# Altium PCB hexapod_board_pcb.PcbDoc
Units mm, origin at the board's own origin, x right, y up, seen from the top; angles counter-clockwise.
Board outline 71.12 x 64.77 mm, 2 copper layers (Top Layer, Bottom Layer); 14 components, 8 nets, 100 pads, 13 vias.
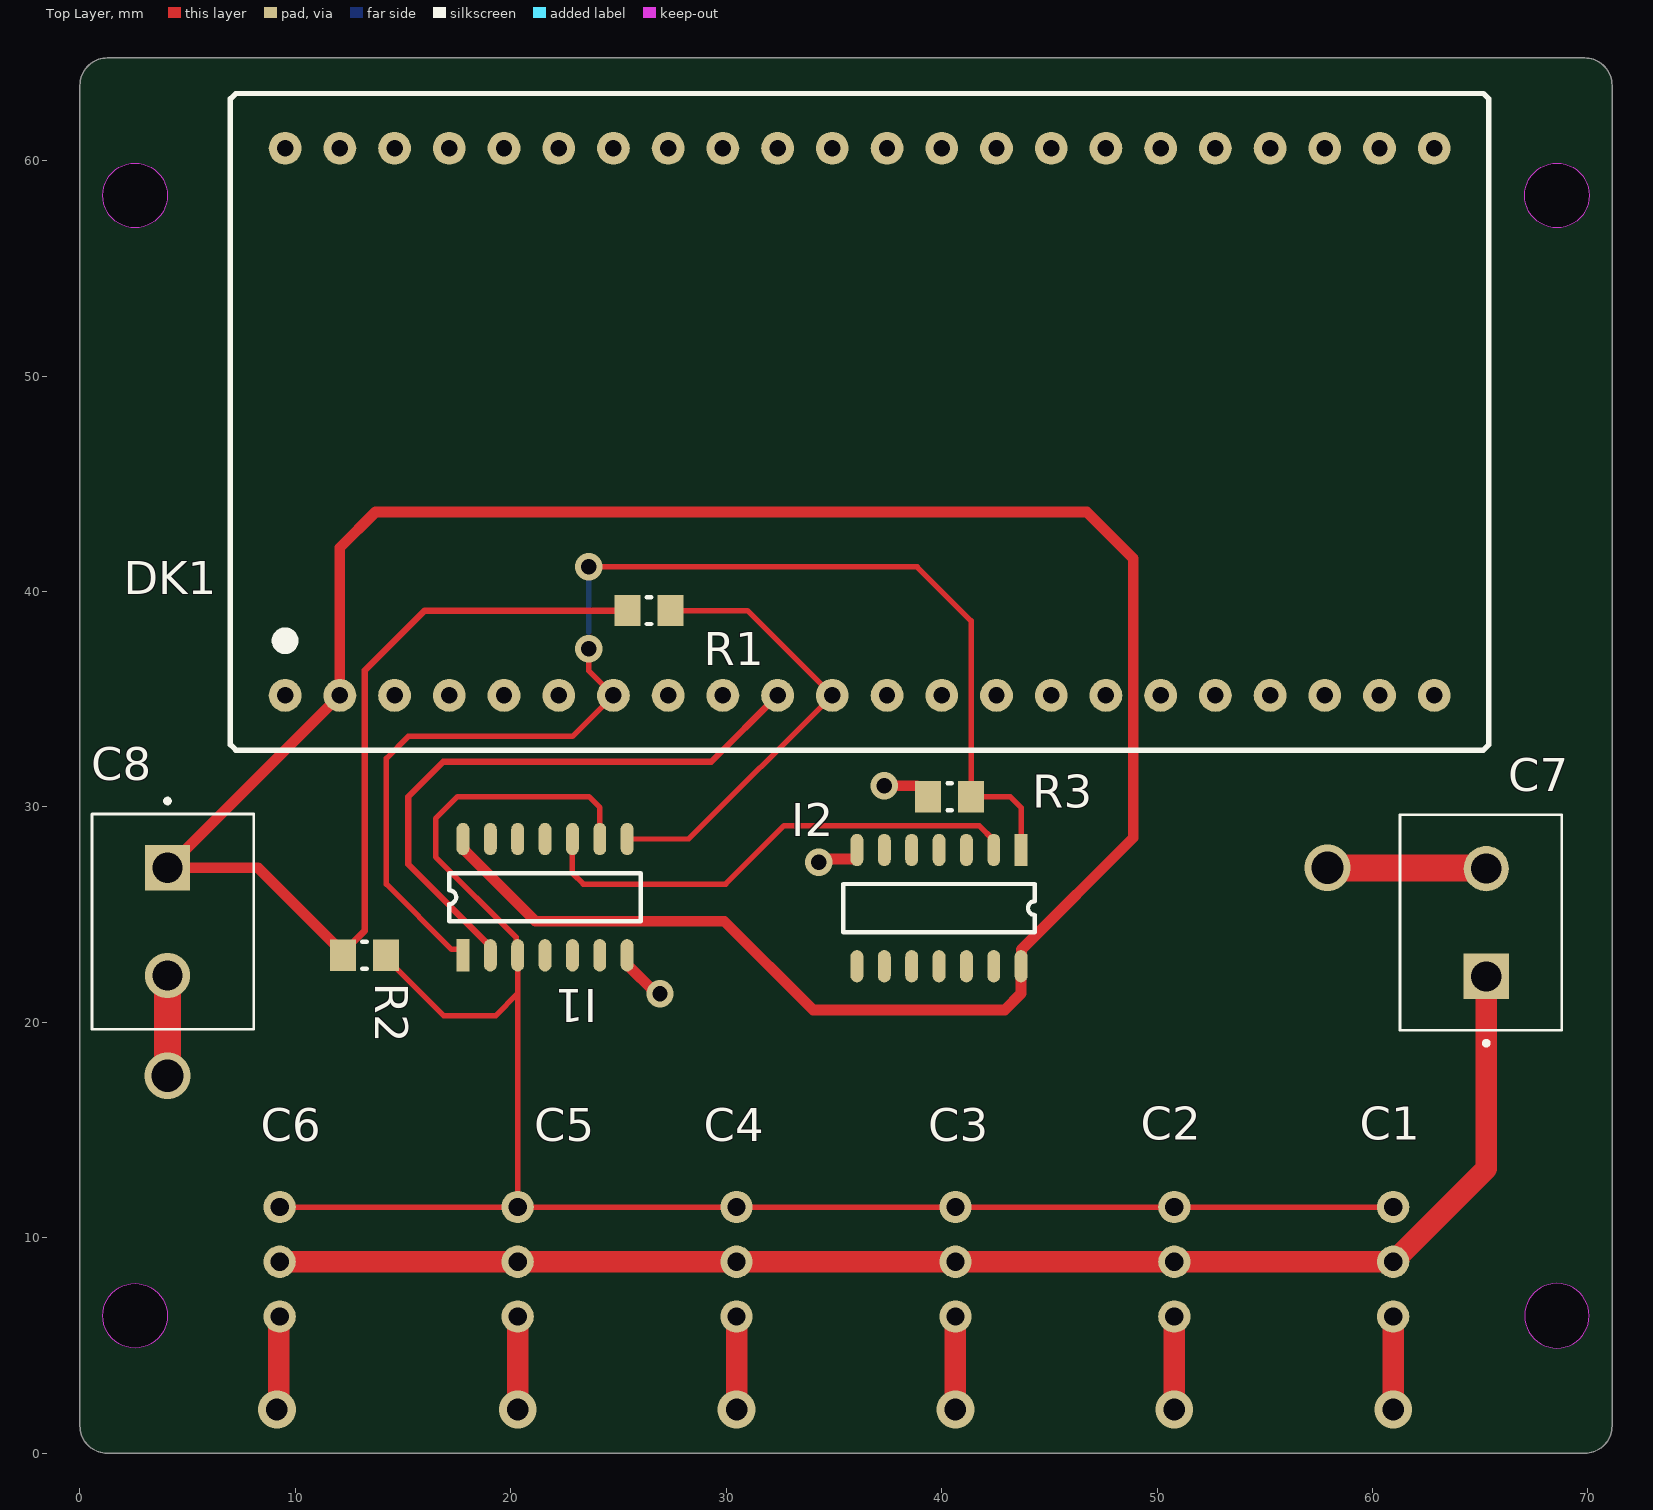
[diagram p0: Top Layer view]
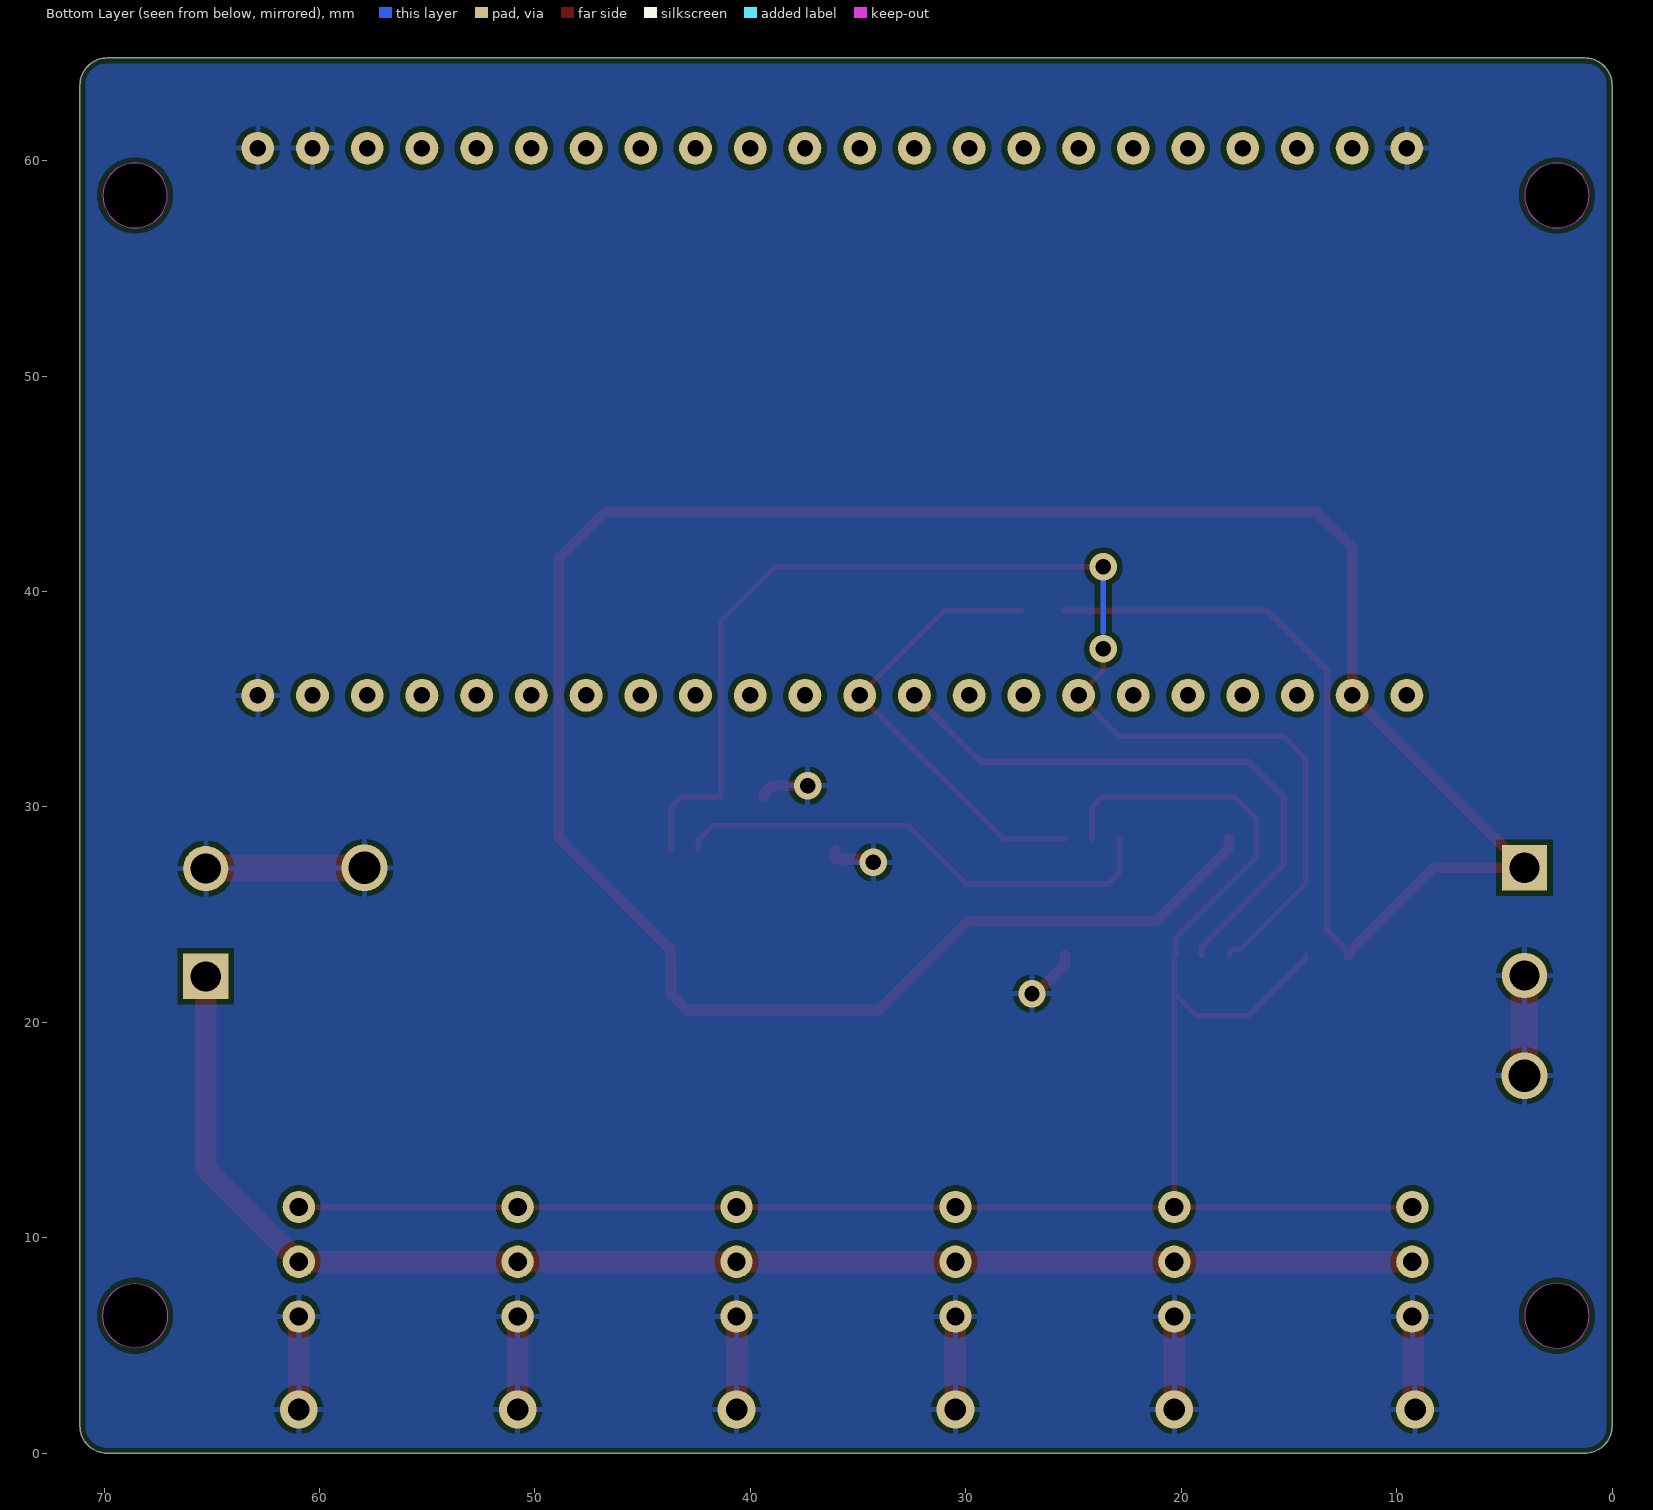
[diagram p1: Bottom Layer view, seen from below]
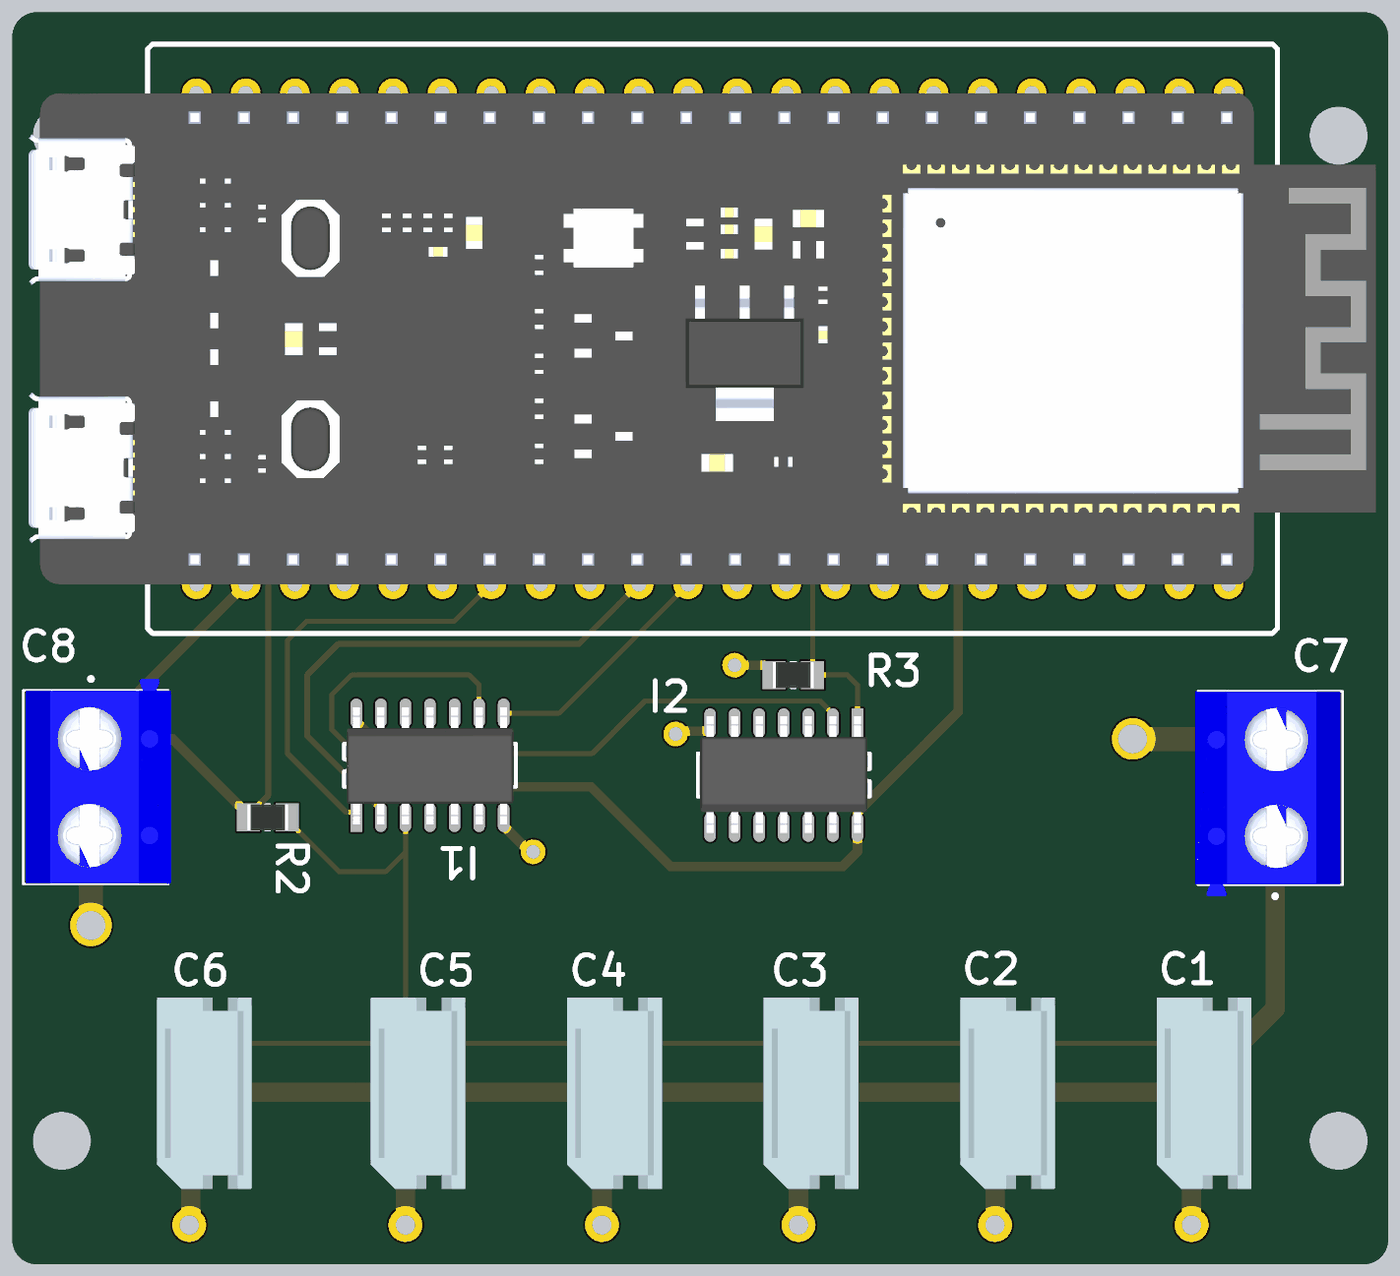
[diagram p2: 3D render of the assembled board from above, using the file's embedded part models]

## Layer stack, top to bottom
Top Solder: solder mask 0.0102, Solder Resist, Dk 3.5
Top Layer: signal copper 0.0356
Dielectric 1: dielectric 0.32, FR-4, Dk 4.8
Bottom Layer: signal copper 0.0356
Bottom Solder: solder mask 0.0102, Solder Resist, Dk 3.5

## Board outline
0,1.27 0,63.5 cw(c1.27,63.5) 1.27,64.77 69.85,64.77 cw(c69.85,63.5) 71.12,63.5 71.12,1.27 cw(c69.85,1.27) 69.85,0 1.27,0 cw(c1.27,1.27)
cut-out: 2.56,4.885 cw(c2.56,6.385) 1.06,6.385 cw(c2.56,6.385) 2.56,7.885 cw(c2.56,6.385) 4.06,6.385 cw(c2.56,6.385)
cut-out: 67.06,6.385 ccw(c68.56,6.385) 68.56,4.885 ccw(c68.56,6.385) 70.06,6.385 ccw(c68.56,6.385) 68.56,7.885 ccw(c68.56,6.385)
cut-out: 68.56,56.885 cw(c68.56,58.385) 67.06,58.385 cw(c68.56,58.385) 68.56,59.885 cw(c68.56,58.385) 70.06,58.385 cw(c68.56,58.385)
cut-out: 2.56,56.885 cw(c2.56,58.385) 1.06,58.385 cw(c2.56,58.385) 2.56,59.885 cw(c2.56,58.385) 4.06,58.385 cw(c2.56,58.385)

## Design rules (kind name [scope] priority, off if disabled: settings)
AssemblyTestPointUsage [All] p1: isadvanced=TRUE
AssemblyTestpoint [All] p1: isadvanced=TRUE testpointundercomponent=TRUE minsize=1.016 maxsize=2.54 preferedsize=1.524 minholesize=0 maxholesize=1.016 preferedholesize=0.813 testpointgrid=0.025 usegrid=TRUE gridtolerance=0 allowsidetop=TRUE allowsidebottom=TRUE
BoardOutlineClearance BoardOutlineClearance_2 [All] p1: isadvanced=TRUE gap=0.254 ignorepadtopadclearanceinfootprint=FALSE except(0: Arc-SplitContinuation Track-SplitContinuation SMDPad-SplitContinuation THPad-SplitContinuation Via-SplitContinuation Fill-SplitContinuation Poly-SplitContinuation Region-SplitContinuation Text-SplitContinuation)
BoardOutlineClearance BoardOutlineClearance_1 [All] p2: isadvanced=TRUE gap=0.254 ignorepadtopadclearanceinfootprint=FALSE except(0: Arc-SplitContinuation Track-SplitContinuation SMDPad-SplitContinuation THPad-SplitContinuation Via-SplitContinuation Fill-SplitContinuation Poly-SplitContinuation Region-SplitContinuation Text-SplitContinuation)
Clearance Clearance_1 [All] p1: isadvanced=TRUE gap=0.254 ignorepadtopadclearanceinfootprint=TRUE except(0: Hole-Hole; 0.1: Arc-Arc Arc-Track Arc-SMDPad Arc-Text Track-Track Track-SMDPad Track-Text SMDPad-SMDPad SMDPad-Fill SMDPad-Text Text-Text)
Clearance Clearance_1 [OnMid vs OnMid] p2: gap=0.254 ignorepadtopadclearanceinfootprint=FALSE sourcerule=42 cellrowname=All cellrowtype=0 cellcolname=All cellcoltype=0 innerlayers=TRUE
Clearance Clearance_2 [(ExistsOnLayer('Top Layer') Or ExistsOnLayer('Bottom Layer')) vs (ExistsOnLayer('Top Layer') Or ExistsOnLayer('Bottom Layer'))] p3: gap=0.254 ignorepadtopadclearanceinfootprint=FALSE sourcerule=42 cellrowname=All cellrowtype=0 cellcolname=All cellcoltype=0 outerlayers=TRUE
Clearance [All] p4: gap=0.254 ignorepadtopadclearanceinfootprint=FALSE ismatrix=TRUE
ComponentClearance [All] p1: isadvanced=TRUE gap=0.254 collisioncheckmode=3 verticalgap=0.254 showdistances=FALSE
FabricationTestPointUsage [All] p1: isadvanced=TRUE valid=0 allowmultiple=FALSE
FabricationTestpoint [All] p1: isadvanced=TRUE side=3 testpointundercomponent=TRUE minsize=1.016 maxsize=2.54 preferedsize=1.524 minholesize=0 maxholesize=1.016 preferedholesize=0.813 testpointgrid=0.025 allowsidetop=TRUE allowsidebottom=TRUE usegrid=TRUE gridtolerance=0
FanoutControl Fanout_BGA [IsBGA] p1: isadvanced=TRUE bgadir=Out bgaviamode=Centered fanoutstyle=Auto fanoutdirection=Alternating viagrid=0.025 // Fanout_BGA (Default Rule)
FanoutControl Fanout_LCC [IsLCC] p2: isadvanced=TRUE bgadir=Out bgaviamode=Centered fanoutstyle=Auto fanoutdirection=Alternating viagrid=0.025 // Fanout_LCC (Default Rule)
FanoutControl Fanout_SOIC [IsSOIC] p3: isadvanced=TRUE bgadir=Out bgaviamode=Centered fanoutstyle=Auto fanoutdirection=Alternating viagrid=0.025 // Fanout_SOIC (Default Rule)
FanoutControl Fanout_Small [(CompPinCount < 5)] p4: isadvanced=TRUE bgadir=Out bgaviamode=Centered fanoutstyle=Auto fanoutdirection=OutThenIn viagrid=0.025 // Fanout_Small (Default Rule)
FanoutControl Fanout_Default [All] p5: isadvanced=TRUE bgadir=Out bgaviamode=Centered fanoutstyle=Auto fanoutdirection=Alternating viagrid=0.025 // Fanout_Default (Default Rule)
Height [All] p1: isadvanced=TRUE minheight=0 maxheight=25.4 prefheight=12.7
HoleSize [All] p1: isadvanced=TRUE absolutevalues=TRUE maxlimit=2.54 minlimit=0.203 maxpercent=80.000 minpercent=20.000
HoleToHoleClearance [All] p1: isadvanced=TRUE gap=0.254 allowstackedmicrovias=TRUE
LayerPairs [All] p1: isadvanced=TRUE enforce=TRUE
MinimumSolderMaskSliver [All] p1: isadvanced=TRUE minsoldermaskwidth=0.254
NetAntennae [All] p1: isadvanced=TRUE netantennaetolerance=0
PasteMaskExpansion [All] p1: isadvanced=TRUE expansion=0
PlaneClearance [All] p1: isadvanced=TRUE clearance=0.508
PlaneConnect [All] p1: isadvanced=TRUE planeconnectstyle=Relief reliefexpansion=0.508 reliefentries=4 reliefconductorwidth=0.254 reliefairgap=0.254
PolygonConnect [All] p1: connectstyle=Relief reliefconductorwidth=0.254 reliefentries=4 polygonreliefangle="90 Angle" airgapwidth=0.254
RoutingCorners [All] p1: isadvanced=TRUE cornerstyle=45-Degree minsetback=2.54 maxsetback=2.54
RoutingPriority [All] p1: isadvanced=TRUE routingpriority=0
RoutingVias RoutingViaStyle_1 [All] p1: isadvanced=TRUE holewidth=0.4 width=0.6 viastyle="Through Hole" minholewidth=0.2 minwidth=0.3 maxholewidth=2.5 maxwidth=3
RoutingVias [All] p2: holewidth=0.711 width=1.27 viastyle="Through Hole" minholewidth=0.711 minwidth=1.27 maxholewidth=0.711 maxwidth=1.27
ShortCircuit [All] p1: isadvanced=TRUE allowed=FALSE
SilkToSilkClearance [All] p1: isadvanced=TRUE silktosilkclearance=0.254
SilkToSolderMaskClearance [IsPad] p1: isadvanced=TRUE minsilkscreentomaskgap=0.175 clearancetoexposedcopper=TRUE
SolderMaskExpansion [All] p1: isadvanced=TRUE expansion=0.102 istentingtop=FALSE
UnRoutedNet UnRoutedNet_1 [InNet('GND')] p1: isadvanced=TRUE checkbadconnections=TRUE
UnRoutedNet [All] p2: isadvanced=TRUE
UnpouredPolygon [All] p1: isadvanced=TRUE
Width MaxMinWidth_1 [All] p1: isadvanced=TRUE maxlimit=1.27 minlimit=0.102 preferedwidth=0.254 minimp=50.000000 maximp=50.000000 favimp=50.000000
Width [All] p2: maxlimit=3 minlimit=0.1 preferedwidth=0.3
4 further rules are at their usual default settings.

## Classes and differential pairs
component class hexapod_board_schematics: C1 C2 C3 C5 C6 C7 C8 DK1 I1 I2 R1 R3

## Components (designator, comment, footprint, x,y, rotation, side; value= is the part's Value field where it differs from the comment)
C1 "MOLEX 22-03-5035" PCBComponent_1 60.96,6.35 r90 top
C2 "MOLEX 22-03-5035" PCBComponent_1 50.8,6.35 r90 top
C3 "MOLEX 22-03-5035" PCBComponent_1 30.48,6.35 r90 top
C4 "MOLEX 22-03-5035" PCBComponent_1 20.32,6.35 r90 top
C5 "MOLEX 22-03-5035" PCBComponent_1 9.271,6.35 r90 top
C6 "MOLEX 22-03-5035" PCBComponent_1 40.64,6.35 r90 top
C7 "ARK connector 5mm" "ARK connector footprint" 65.278,24.638 r90 top
C8 "ARK connector 5mm" "ARK connector footprint" 4.064,24.678 r270 top
DK1 "ESP32-S3" "ESP32-S3-DevKit footprint" 34.925,47.879 r90 top
I1 "74LVC125A" SOP14 17.78,23.114 r90 top
I2 "74LVC14AD" SOP14 43.688,28.006 r270 top
R1 "10k" RESC2013X60X35ML10T20 26.416,39.116 r180 top
R2 "10k" RESC2013X60X35ML10T20 13.208,23.114 r180 top
R3 "10k" RESC2013X60X35ML10T20 40.37,30.48 r0 top

## Footprints (in the part's own frame and the unit in brackets; to place one, negate y for a bottom-side part, rotate by r counter-clockwise, add the part's x,y. Pads: shape width x height; smd on the part's side, far side on the other; paste and mask are expansions set on the pad)
"ARK connector footprint" [mm]
  rect 2.1x2.1 hole 1.4: 1(-2.5,0)
  round 2.1 hole 1.4: 2(2.5,0)
  silkscreen extent -5.7,-3.5 5,4, body extent -5.6,-3.37 5,4.13, height 10
"ESP32-S3-DevKit footprint" [mil]
  round 60 hole 30: 1(-500,1000) 2(-500,900) 3(-500,800) 4(-500,700) 5(-500,600) 6(-500,500) 7(-500,400) 8(-500,300) 9(-500,200) 10(-500,100) 11(-500,0) 12(-500,-100) 13(-500,-200) 14(-500,-300) 15(-500,-400) 16(-500,-500) 17(-500,-600) 18(-500,-700) 19(-500,-800) 20(-500,-900) 21(-500,-1000) 22(-500,-1100) 23(500,-1100) 24(500,-1000) 25(500,-900) 26(500,-800) 27(500,-700) 28(500,-600) 29(500,-500) 30(500,-400) 31(500,-300) 32(500,-200) 33(500,-100) 34(500,0) 35(500,100) 36(500,200) 37(500,300) 38(500,400) 39(500,500) 40(500,600) 41(500,700) 42(500,800) 43(500,900) 44(500,1000)
  silkscreen extent -600,-1200 600,1100, body extent -500,-1400 500,1342, height 361
PCBComponent_1 [mm]
  round 1.5 hole 0.85: 1(0,0) 2(2.54,0) 3(5.08,0)
  body extent -2.45,-3.1 7.45,1.8, height 5.8
RESC2013X60X35ML10T20 [mm] "Chip Resistor, 2-Leads, Body 2.1x1.35mm, IPC Low Density"
  rect 1.2x1.45 smd: 1(-1,0) 2(1,0)
  silkscreen extent -0.1,-0.62 0.1,0.62, body extent -1.05,-0.68 1.05,0.67, height 0.6
SOP14 [mm]
  rect 1.5x0.6 smd: 1(0,0)
  oval 1.5x0.6 smd: 2(0,-1.27) 3(0,-2.54) 4(0,-3.81) 5(0,-5.08) 6(0,-6.35) 7(0,-7.62) 8(5.4,0) 9(5.4,-1.27) 10(5.4,-2.54) 11(5.4,-3.81) 12(5.4,-5.08) 13(5.4,-6.35) 14(5.4,-7.62)
  silkscreen extent 1.59,-8.25 3.81,0.64, body extent -0.36,-8.13 5.69,0.51, height 1.64

## Part data
DK1: library part "ESP32-S3-N16R2 DevKit"
R1 R2 R3: library part CMP-2100-03673-1, "Chip Resistor, 0 Ohm, Jumper, +/- 5%, 0.125 W, -55 to 155 degC, 0805 (2012 Metric), RoHS, Tape and Reel", Case Code (Imperial)=0805, Case Code (Metric)=2012, Manufacturer=Yageo, Max Operating Temperature=155degC, Min Operating Temperature=-55degC, Package Description="2-Pin Surface Mounted Device, Body 2 x 1.25 mm", Power Rating=125mW, Resistance=0mOhm, Temperature Coefficient=200ppm/degreesC, Tolerance=5%, Voltage Rating=150V, Case/Package=0805, Composition=ThickFilm, Contact Plating=Tin, Datasheet URL=http://www.yageo.com/NewPortal/yageodocoutput?fileName=/pdf/R-Chip/PYu-RC_Group_51_RoHS_L_5.pdf, Datasheet Version="Rev. 5, 10/2016", Depth=1.25mm, Height=0.5mm, Lead Free=LeadFree, Length=2mm, Manufacturer URL=http://www.yageo.com/, Military Standard=Not, Number of Pins=2, Package Reference=0805, Packaging=TapeandReel, Radiation Hardening=No, REACH SVHC=Unknown, RoHSCompliant=true, Termination=SMD/SMT, Voltage Rating (DC)=150V, Width=1.25mm

## Via types
v1: diameter 1.75, hole 1, Top Layer to Bottom Layer, 6 vias
v2: diameter 1.27, hole 0.711, Top Layer to Bottom Layer, 5 vias
v3: diameter 2.15, hole 1.5, Top Layer to Bottom Layer, 2 vias

## Nets (pads, with @x,y where several pads share a name; then routed paths per layer and width w, separated by ;. In a path a pad name is that pad's centre, name@x,y a point inside that pad or via, vN(x,y) a via of type N, cw(c..) or ccw(c..) an arc to the next point about the centre after c; other vN are vias at no path point)
3V3: C8.1 DK1.2 I1.8 I2.8 R1.2 R2.2 | length 145.5
  Top Layer w0.3: R2.2@12.208,23.239 13.231,24.262 13.231,36.345 16.002,39.116 R1.2
  Top Layer w0.5: R2.2 12.208,23.239 8.269,27.178 C8.1 DK1.2 12.065,42.037 13.716,43.688 46.736,43.688 48.891,41.533 48.891,28.571 43.707,23.387 43.707,22.625 I2.8 43.688,21.336 42.926,20.574 34.036,20.574 29.912,24.698 21.146,24.698 17.78,28.064 I1.8
12V: C1.2 C2.2 C3.2 C4.2 C5.2 C6.2 C7.1 | length 66.7
  Top Layer w1: C5.2 C4.2 C3.2 C6.2 C2.2 C1.2 65.278,13.208 C7.1
GND: C1.1 C2.1 C3.1 C4.1 C5.1 C6.1 C7.2 C8.2 DK1.22 DK1.23 DK1.24 DK1.44 I1.7 I2.7 R3.1 | length 45.1
  Top Layer w0.5: I1.7 25.4,22.691 26.755,21.336 v2(26.924,21.336) ; v2(34.29,27.432) 34.437,27.579 36.022,27.579 36.068,27.626 I2.7 ; v2(37.338,30.988) 38.862,30.988 38.895,30.955 39.02,30.955 39.37,30.605 R3.1
  Top Layer w1: v1@9.223,2.111 C5.1@9.223,6.302 ; v1(20.32,2.032) C4.1 ; v1(30.48,2.032) C3.1 ; v1(40.64,2.032) C6.1 ; v1(50.8,2.032) C2.1 ; v1(60.96,2.032) C1.1
  Top Layer w1.25: v3(4.064,17.526) C8.2 ; v1(9.144,2.032) v1@9.223,2.111 ; C5.1@9.223,6.302 C5.1 ; v3(57.912,27.178) 57.932,27.158 65.258,27.158 C7.2
RX: DK1.11 I1.14 R1.1 | length 21.4
  Top Layer w0.254: I1.14 28.26,28.514 DK1.11 30.988,39.116 R1.1
RXEN: I1.12 I2.2 | length 23.2
  Top Layer w0.254: I1.12 22.86,26.924 23.368,26.416 29.972,26.416 32.693,29.137 41.737,29.137 42.418,28.456 I2.2
SERVO_DATA: C1.3 C2.3 C3.3 C4.3 C5.3 C6.3 I1.3 I1.13 R2.1 | length 88
  Top Layer w0.254: C5.3 C4.3 C3.3 C6.3 C2.3 C1.3 ; R2.1 14.208,22.989 16.877,20.32 19.304,20.32 20.32,21.336 ; 20.32,12.192 20.32,21.336 ; I1.13 24.13,29.972 23.622,30.48 17.526,30.48 16.51,29.464 16.51,27.686 20.254,23.942 20.254,23.18 I1.3 20.32,21.336
TX: DK1.10 I1.2 | length 28
  Top Layer w0.3: I1.2 19.05,23.526 15.24,27.336 15.24,30.48 16.86,32.1 29.306,32.1 DK1.10
TXEN: DK1.7 I1.1 I2.1 R3.2 | length 59.7
  Top Layer w0.254: I1.1 17.78,23.219 17.607,23.392 17.248,23.392 14.224,26.416 14.224,32.258 15.24,33.274 22.86,33.274 DK1.7 23.622,36.322 v2(23.622,37.338) ; v2(23.622,41.148) 38.862,41.148 41.37,38.64 R3.2 43.18,30.48 43.688,29.972 I2.1
  Bottom Layer w0.254: 23.622,38.1 v2(23.622,41.148)
pads on no net: DK1.1 DK1.3 DK1.4 DK1.5 DK1.6 DK1.8 DK1.9 DK1.12 DK1.13 DK1.14 DK1.15 DK1.16 DK1.17 DK1.18 DK1.19 DK1.20 DK1.21 DK1.25 DK1.26 DK1.27 DK1.28 DK1.29 DK1.30 DK1.31 DK1.32 DK1.33 DK1.34 DK1.35 DK1.36 DK1.37 DK1.38 DK1.39 DK1.40 DK1.41 DK1.42 DK1.43 I1.4 I1.5 I1.6 I1.9 I1.10 I1.11 I2.3 I2.4 I2.5 I2.6 I2.9 I2.10 I2.11 I2.12 I2.13 I2.14

## Polygon pours and split planes (outlines as drawn)
GND on Bottom Layer "GND" (solid, pour order 0): -2.54,68.326 -1.778,67.564 75.184,67.564 75.184,-7.112 74.422,-7.874 -4.064,-7.874

## Silkscreen, mask and mechanical layers (free items; w line width, h text height)
Mechanical 1:
  circle w0.381: c68.56,6.385 r1.5
  circle w0.381: c68.56,58.385 r1.5
  circle w0.381: c2.56,6.385 r1.5
  circle w0.381: c2.56,58.385 r1.5
  lines w0.254: 0,1.27 ccw(c1.27,1.27) 1.27,0 69.85,0 ccw(c69.85,1.27) 71.12,1.27 71.12,63.5 ccw(c69.85,63.5) 69.85,64.77 8.89,64.77 1.27,64.77 ccw(c1.27,63.5) 0,63.5 0,1.27